# Altium PCB ENCBoard.PcbDoc
Units mm, origin at the board's own origin, x right, y up, seen from the top; angles counter-clockwise.
Board outline 112.2 x 111.6 mm, 2 copper layers (Top Layer, Bottom Layer); 95 components, 68 nets, 396 pads, 127 vias.
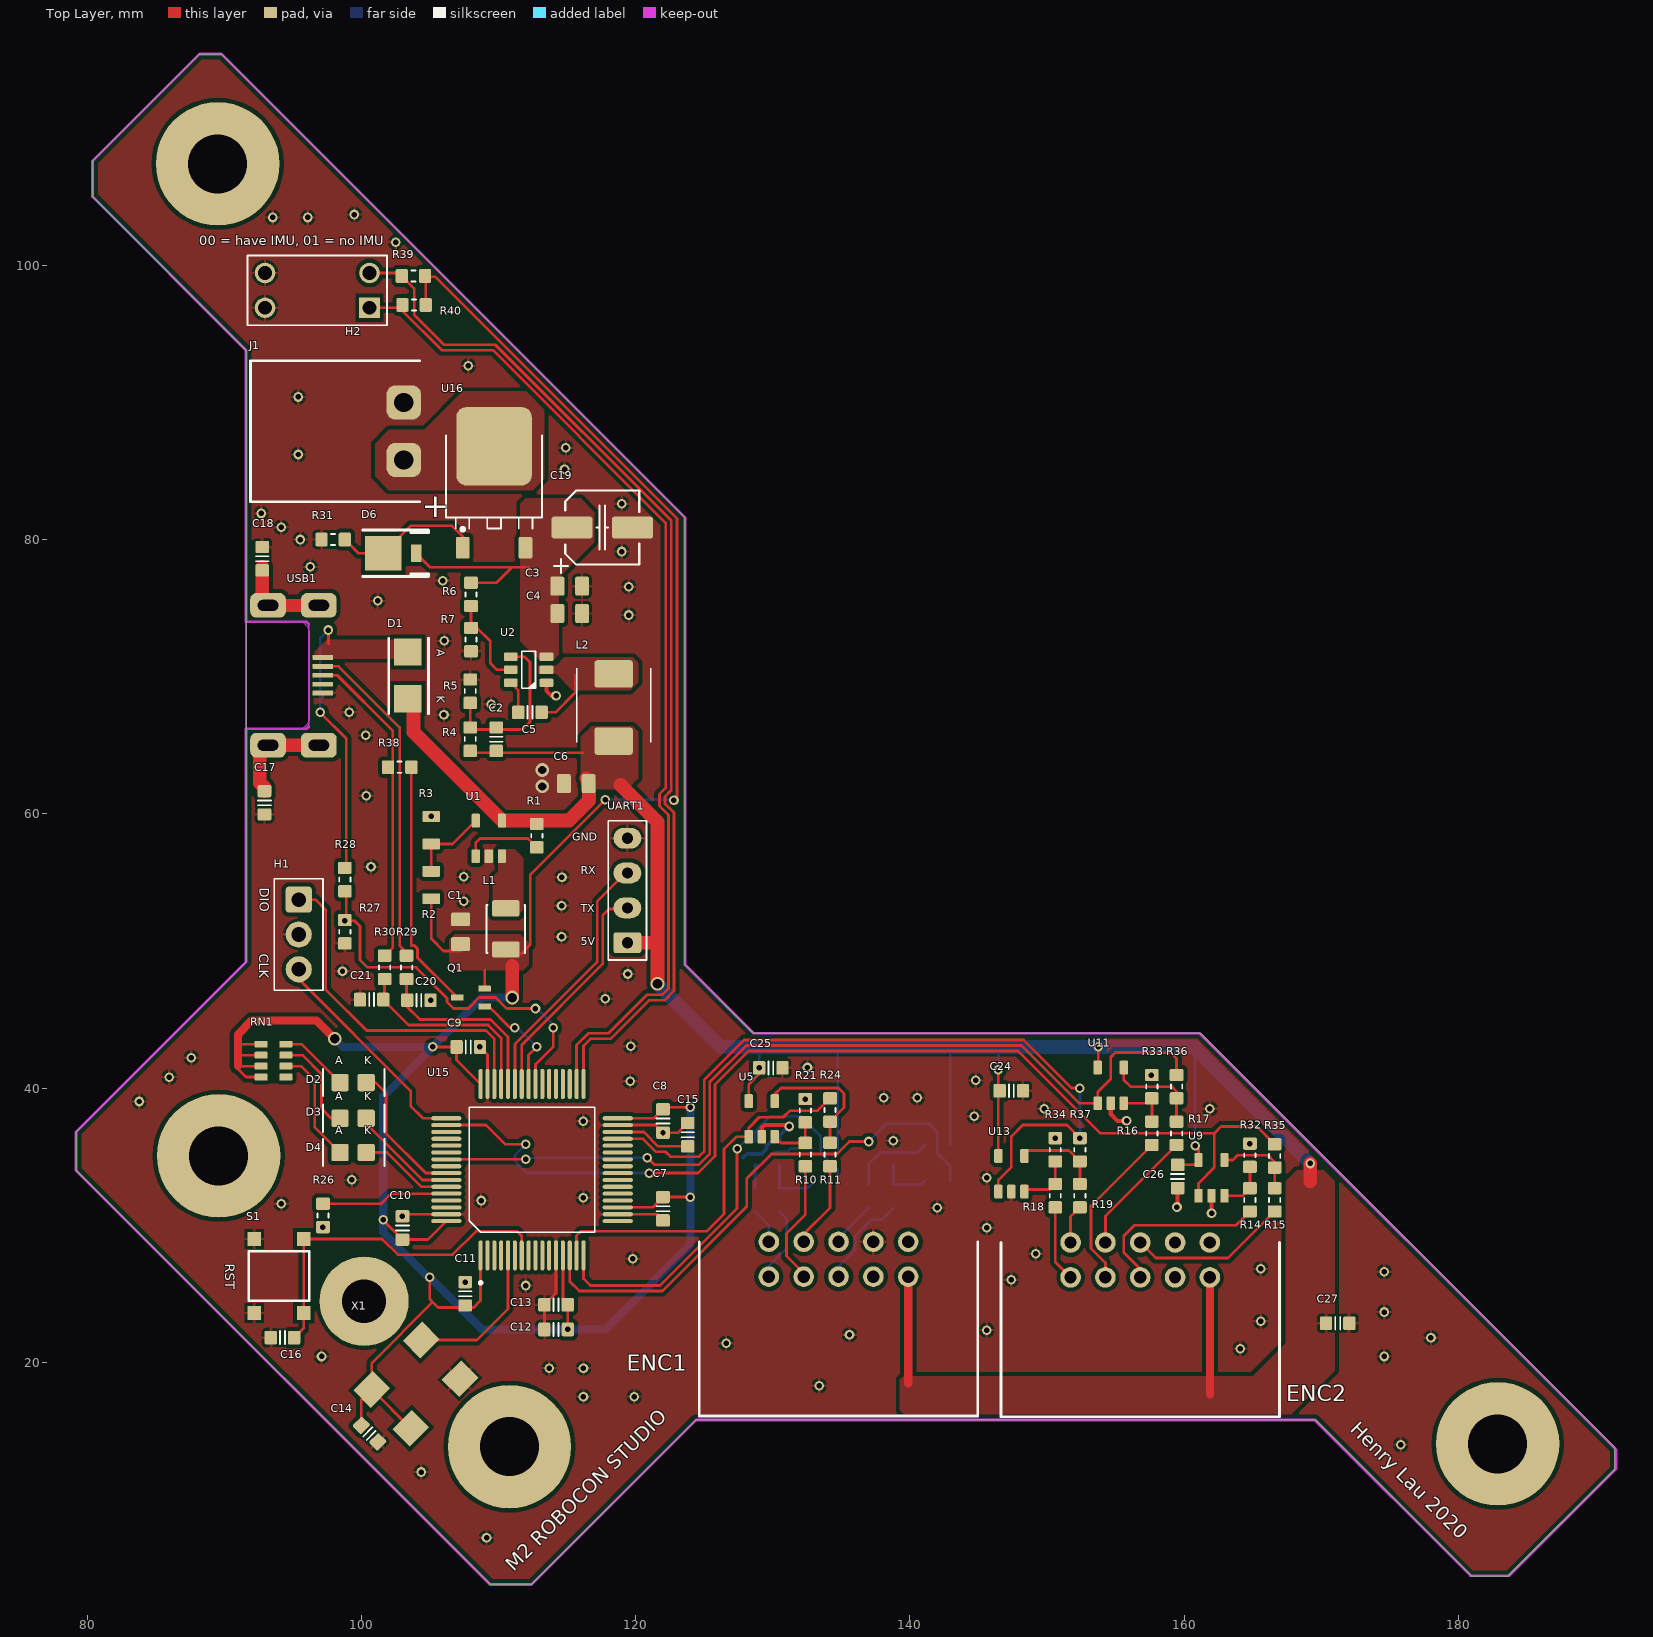
[diagram p0: Top Layer view]
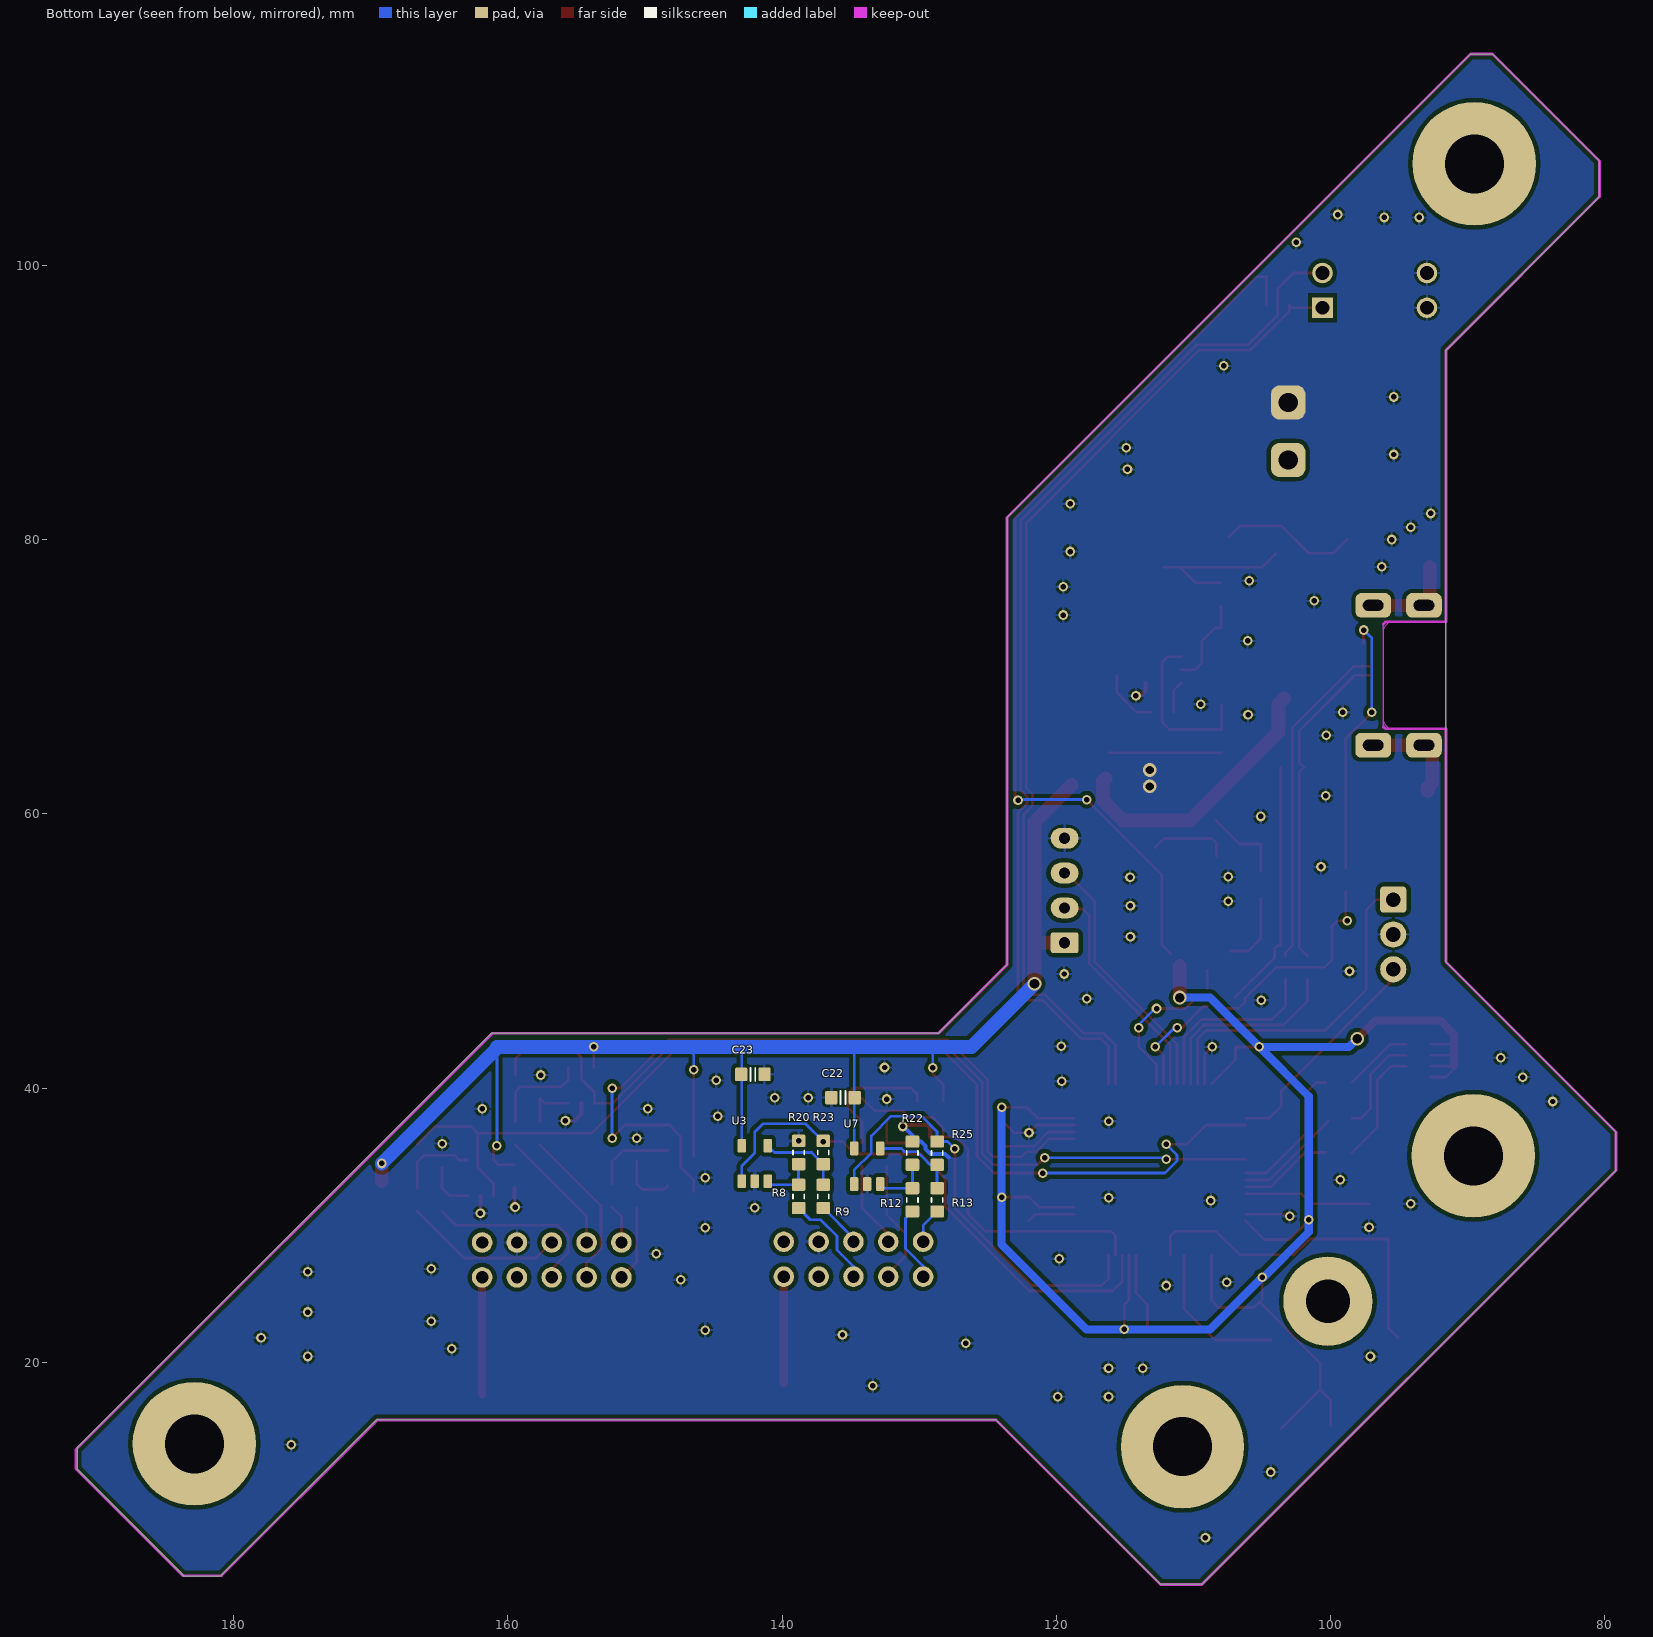
[diagram p1: Bottom Layer view, seen from below]
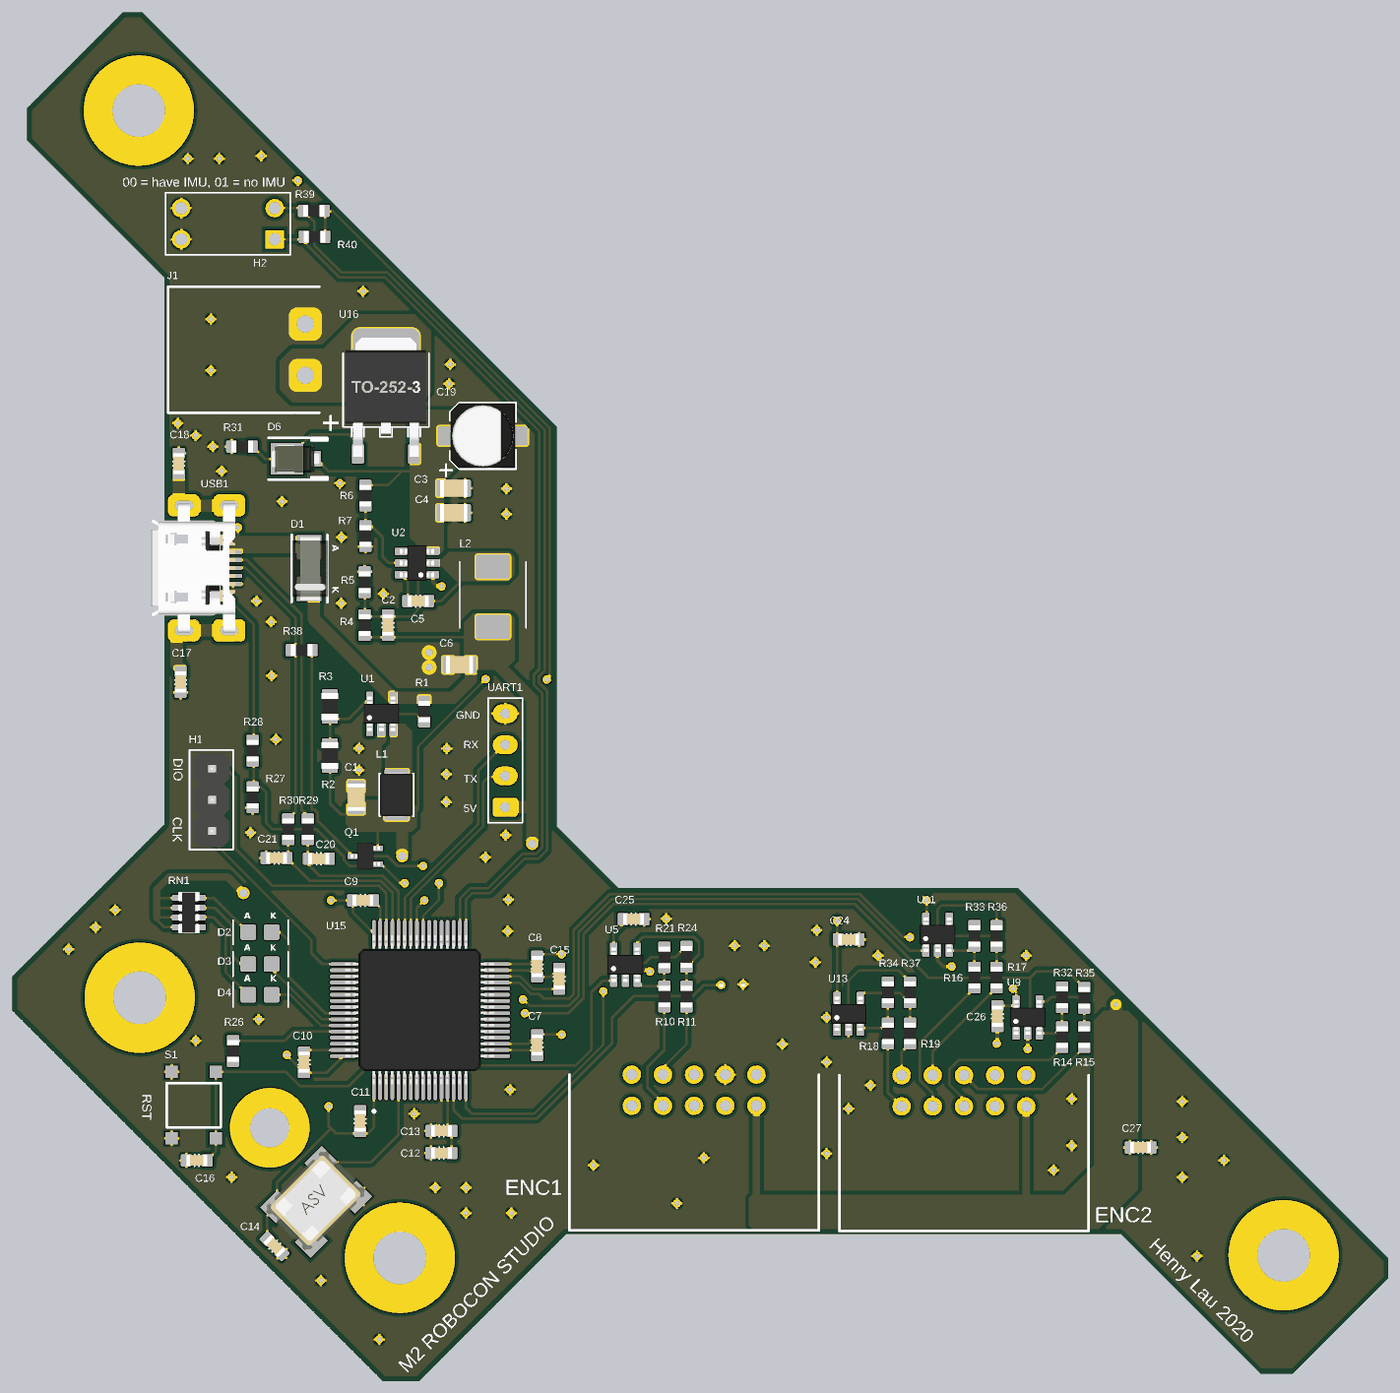
[diagram p2: 3D render of the assembled board from above, using the file's embedded part models]
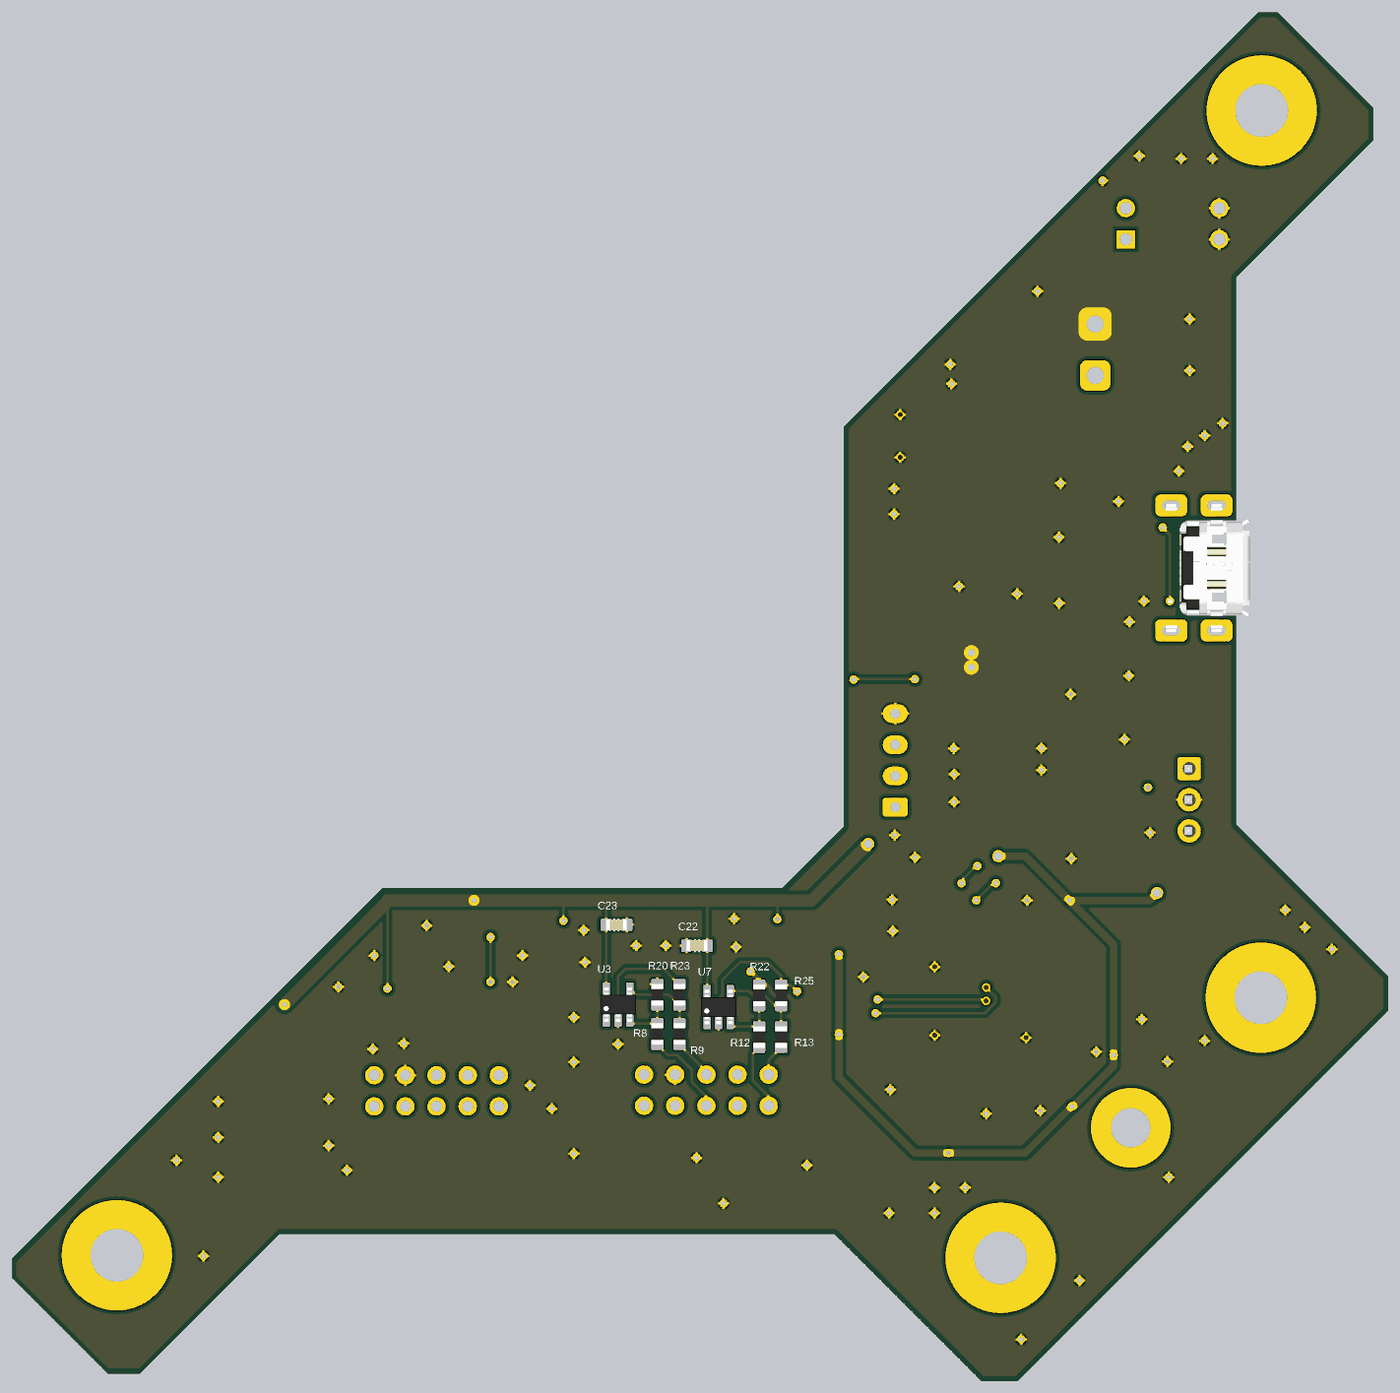
[diagram p3: 3D render of the assembled board from below, using the file's embedded part models]

## Layer stack, top to bottom
Top Solder: solder mask 0.0102, Solder Resist, Dk 3.5
Top Layer: signal copper 0.0356
Dielectric 1: dielectric 0.32, FR-4, Dk 4.8
Bottom Layer: signal copper 0.0356
Bottom Solder: solder mask 0.0102, Solder Resist, Dk 3.5

## Board outline
79.2,34 79.2,36.8 91.6,49.2 91.6,93.8 80.4,105 80.4,107.6 88.2,115.4 89.8,115.4 123.6,81.6 123.6,49 128.6,44 161.2,44 191.4,13.8 191.4,12.2 183.6,4.4 181,4.4 169.6,15.8 124.4,15.8 112.4,3.8 109.4,3.8

## Design rules (kind name [scope] priority, off if disabled: settings)
BoardOutlineClearance [All] p1: gap=0.1 ignorepadtopadclearanceinfootprint=FALSE
Clearance "GND plane" [InNamedPolygon('GND_L02_P028', 'GND_L01_P030')] p1: gap=0.3 ignorepadtopadclearanceinfootprint=FALSE
Clearance 24V [InNet('24V', 'NetJ1_2')] p2: gap=0.3 ignorepadtopadclearanceinfootprint=FALSE
Clearance [All] p3: gap=0.2 ignorepadtopadclearanceinfootprint=FALSE
HoleSize [All] p1: absolutevalues=TRUE maxlimit=100 minlimit=0.4 maxpercent=80.000 minpercent=20.000
MinimumSolderMaskSliver [All] p1: minsoldermaskwidth=0.09
PolygonConnect Power [InNet('24V', 'NetJ1_2', 'NetC5_1', 'NetD1_A') OR InComponent('L1', 'L2', 'C6', 'U1','C1', 'J1', 'C19')or (AsMM(ViaDiameter) > 0.7)] p1: connectstyle=Direct reliefconductorwidth=0.254 reliefentries=4 polygonreliefangle="90 Angle" airgapwidth=0.254
PolygonConnect [All] p2: connectstyle=Relief reliefconductorwidth=0.2 reliefentries=4 polygonreliefangle="90 Angle" airgapwidth=0.2
RoutingVias [All] p1: holewidth=0.4 width=0.7 viastyle="Through Hole" minholewidth=0.4 minwidth=0.7 maxholewidth=99 maxwidth=100
SilkToSilkClearance [All] p1: silktosilkclearance=0.05
SilkToSolderMaskClearance [IsPad] p1: minsilkscreentomaskgap=0.05 clearancetoexposedcopper=TRUE
SolderMaskExpansion [All] p1: expansion=0.102
Width [All] p1: maxlimit=10 minlimit=0.2 preferedwidth=0.2
26 further rules are at their usual default settings.

## Classes and differential pairs
component class U_PWRInput: C19 D6 J1 R31 U16
component class U_STM32F401R: C7 C8 C9 C10 C11 C12 C13 C14 C15 C16 C17 C18 C20 C21 D1 D2 D3 D4 H1 H2 Q1 R26 R27 R28 R29 R30 R38 R39 R40 RN1 S1 U15 UART1 USB1 X1
component class U_EncoderHeader: C22 C23 C24 C25 C26 C27 ENC1 ENC2 R8 R9 R10 R11 R12 R13 R14 R15 R16 R17 R18 R19 R20 R21 R22 R23 R24 R25 R32 R33 R34 R35 R36 R37 U3 U5 U7 U9 U11 U13
component class U_24V_to_5V: C2 C3 C4 C5 C6 L2 R4 R5 R6 R7 U2
component class U_5V_to_3V3: C1 L1 R1 R2 R3 U1

## Components (designator, comment, footprint, x,y, rotation, side; value= is the part's Value field where it differs from the comment)
C1 "Cap" CAPC2012X135N 107.243,51.4 r270 top value=10u
C2 "Cap" CAPC1608X90N 109.843,65.44 r270 top value=100p
C3 "Cap" CAPC2012X135N 115.2,76.6 r180 top value=4u7
C4 "Cap" CAPC2012X135N 115.2,74.6 r180 top value=4u7
C5 "Cap" CAPC1608X90N 112.298,67.4 r180 top value=0.1u
C6 "Cap" CAPC2012X135N 115.674,62.198 r0 top value=22u
C7 "Cap" CAPC1608X90N 122,31.2 r90 top value=1u
C8 "Cap" CAPC1608X90N 122,37.6 r90 top value=1u
C9 "Cap" CAPC1608X90N 107.8,43 r180 top value=1u
C10 "Cap" CAPC1608X90N 103,29.8 r270 top value=1u
C11 "Cap" CAPC1608X90N 107.574,25 r270 top value=1u
C12 "Cap" CAPC1608X90N 114.2,22.4 r0 top value=1u
C13 "Cap" CAPC1608X90N 114.2,24.2 r0 top value=0.1u
C14 "Cap" CAPC1608X90N 100.6,14.8 r135 top value=0.1u
C15 "Cap" CAPC1608X90N 123.8,36.6 r270 top value=4.7u
C16 "Cap" CAPC1608X90N 94.25,21.8 r0 top value=0.1u
C17 "Cap" CAPC1608X90N 92.938,60.8 r270 top value=0.1u
C18 "Cap" CAPC1608X90N 92.78,78.6 r90 top value=0.1u
C19 "Cap Pol1" CAP_ELEC_5x5.7 117.569,80.874 r180 top value=47u
C20 "Cap" CAPC1608X90N 104.2,46.4 r0 top value=0.1u
C21 "Cap" CAPC1608X90N 100.752,46.45 r0 top value=0.1u
C22 "Cap" CAPC1608X90N 135.563,39.304 r180 bottom value=1u
C23 "Cap" CAPC1608X90N 142.132,41 r0 bottom value=1u
C24 "Cap" CAPC1608X90N 147.4,39.806 r180 top value=1u
C25 "Cap" CAPC1608X90N 129.862,41.471 r180 top value=1u
C26 "Cap" CAPC1608X90N 159.527,33.55 r90 top value=1u
C27 "Cap" CAPC1608X90N 171.2,22.852 r180 top value=1u
D1 "MBRA210LT3G" SMA 103.4,71.8 r270 top
D2 "LED_Green_GullWing" LED-0805-A 99.4,40.4 r0 top
D3 "LED_Green_GullWing" LED-0805-A 99.4,37.8 r0 top
D4 "LED_Green_GullWing" LED-0805-A 99.4,35.3 r0 top
D6 "PTV8.2B-M3/84A" DO-220AA 101.6,79 r0 top
ENC1 "Header 5X2H" HDR2x5RA 139.88,28.79 r0 top
ENC2 "Header 5X2H" HDR2x5RA 161.88,28.74 r0 top
H1 "Header" 1x3POS_HEADER 95.436,51.2 r0 top
H2 "DIP 2 position switch" DIP2-SWT 100.6,96.897 r270 top
J1 "Stackable ScrewTerm" 2P_PCB_TERM 103.1,89.991 r0 top value="2 position"
L1 "inductor" INDM3225X240N 110.535,51.605 r270 top value=2u2
L2 "15uH inductor" INDC_5.5x5.3x3 118.4,70.2 r270 top value=15u
Q1 "DTA114YYUA" SOT323 108,46.6 r180 top
R1 "Res1" RESC1608X55N 112.8,58.4 r270 top value=10K
R2 "Res1" RESC2012X70N 105.1,54.805 r270 top value=100K
R3 "Res1" RESC2012X70N 105.1,58.805 r90 top value=22K
R4 "Res1" RESC1608X55N 107.943,65.44 r270 top value=100K
R5 "Res1" RESC1608X55N 107.943,68.94 r90 top value=13K5
R6 "Res1" RESC1608X55N 108,76 r270 top value=10K
R7 "Res1" RESC1608X55N 108,72.7 r90 top value=2K
R8 "Res1" RESC1608X55N 138.8,32.1 r90 bottom value=1K
R9 "Res1" RESC1608X55N 137,32.1 r270 bottom value=1K
R10 "Res1" RESC1608X55N 132.38,35.15 r90 top value=1K
R11 "Res1" RESC1608X55N 134.18,35.15 r270 top value=1K
R12 "Res1" RESC1608X55N 130.5,31.85 r90 bottom value=1K
R13 "Res1" RESC1608X55N 128.7,31.85 r270 bottom value=1K
R14 "Res1" RESC1608X55N 164.8,31.85 r90 top value=1K
R15 "Res1" RESC1608X55N 166.6,31.85 r270 top value=1K
R16 "Res1" RESC1608X55N 157.65,36.7 r90 top value=1K
R17 "Res1" RESC1608X55N 159.45,36.7 r270 top value=1K
R18 "Res1" RESC1608X55N 150.6,32.15 r90 top value=1K
R19 "Res1" RESC1608X55N 152.4,32.15 r270 top value=1K
R20 "Res1" RESC1608X55N 138.8,35.3 r90 bottom value=680R
R21 "Res1" RESC1608X55N 132.38,38.35 r90 top value=680R
R22 "Res1" RESC1608X55N 130.5,35.25 r90 bottom value=680R
R23 "Res1" RESC1608X55N 137,35.3 r270 bottom value=680R
R24 "Res1" RESC1608X55N 134.18,38.4 r270 top value=680R
R25 "Res1" RESC1608X55N 128.7,35.25 r270 bottom value=680R
R26 "Res1" RESC1608X55N 97.206,30.712 r90 top value=10K
R27 "Res1" RESC1608X55N 98.8,51.4 r270 top value=22K
R28 "Res1" RESC1608X55N 98.8,55.2 r270 top value=10K
R29 "Res1" RESC1608X55N 103.3,48.8 r90 top value=22R
R30 "Res1" RESC1608X55N 101.7,48.8 r90 top value=22R
R31 "Res1" RESC1608X55N 97.95,80 r0 top value=4K7
R32 "Res1" RESC1608X55N 164.8,35.1 r90 top value=680R
R33 "Res1" RESC1608X55N 157.65,40.1 r90 top value=680R
R34 "Res1" RESC1608X55N 150.6,35.5 r90 top value=680R
R35 "Res1" RESC1608X55N 166.6,35.05 r270 top value=680R
R36 "Res1" RESC1608X55N 159.45,40.1 r270 top value=680R
R37 "Res1" RESC1608X55N 152.4,35.5 r270 top value=680R
R38 "Res1" RESC1608X55N 102.8,63.4 r180 top value=1K5
R39 "Res1" RESC1608X55N 103.8,99.218 r180 top value=10K
R40 "Res1" RESC1608X55N 103.852,97.103 r180 top value=10K
RN1 "resistor network" RESCAXS50P160X320X70-8N 93.6,42 r0 top value=1K
S1 "SW_THT_PB_4.3mm" TACT_SWT-SMD-4.4 91.8,24.1 r90 top
U1 "TLV62569" SOT23-5 109.3,58.205 r90 top
U2 "TPS54202" SOT23-6 112.2,70.5 r180 top
U3 "TLV9051" SOT23-5 142,34.5 r90 bottom
U5 "TLV9051" SOT23-5 129.2,37.75 r90 top
U7 "TLV9051" SOT23-5 133.8,34.3 r90 bottom
U9 "TLV9051" SOT23-5 162,33.45 r90 top
U11 "TLV9051" SOT23-5 154.65,40.2 r90 top
U13 "TLV9051" SOT23-5 147.4,33.75 r90 top
U15 "STM32F401RxTx" LQFP64 108.7,27.8 r90 top
U16 "DMP4010SK3Q" TO-252 109.681,83.1 r0 top
UART1 "Programmer" HDR1X4_2.54MMP 119.4,50.6 r90 top
USB1 "USB Micro Type B" USB_MICRO-B 91.6,70.1 r270 top
X1 "ASV-8.000MHZ-EJ-T" "ASV SERIES" 103.594,15.194 r45 top

## Footprints (in the part's own frame and the unit in brackets; to place one, negate y for a bottom-side part, rotate by r counter-clockwise, add the part's x,y. Pads: shape width x height; smd on the part's side, far side on the other; paste and mask are expansions set on the pad)
1x3POS_HEADER [mil] "Connector Header, Single-row 3-position, 0.100\" pitch"
  rrect25% 75x75 hole 42: 1(0,100)
  round 75 hole 42: 2(0,0) 3(0,-100)
  silkscreen extent -70,-160 70,160, body extent -57,-150 57,150, height 335
2P_PCB_TERM [mm]
  rrect50% 2.5x2.5 hole 1.4 mask+0.102: 1(0,0) 2(0,-4.191)
  silkscreen extent -11.18,-7.24 1.14,3.05
"ASV SERIES" [mm] "Footprint used for ASV SERIES standard clock oscillator"
  rect 2x1.8 smd mask+0.102: 1(0,0) 2(5.1,0) 3(5.1,4) 4(0,4)
  body extent -0.9,-0.44 6.1,4.64, height 1.8
CAP_ELEC_5x5.7 [mm] "Capacitor, polarized, aluminum can; 5x5.7mm DxH"
  round 0.508 on Mech15: 0(0,0)
  rrect25% 3x1.6 smd: 1(2.2,0) 2(-2.2,0)
  silkscreen extent -2.7,-2.7 3.5,3.3, body extent -2.65,-2.65 2.65,2.65, height 5.7
CAPC1608X90N [mm] "Chip Capacitor, Body 1.6x0.8mm, EIA 0603, IPC Medium Density"
  round 0.254 on Mech15: 0(0,0)
  rrect25% 0.9x1 smd: 1(-0.85,0) 2(0.85,0)
  Top Layer pour cut-out: -0.6,0.5 -0.4,0.7 0.4,0.7 0.6,0.5 0.6,-0.5 0.4,-0.7 -0.4,-0.7 -0.6,-0.5
  silkscreen extent -0.18,-0.48 0.18,0.48, body extent -0.85,-0.45 0.85,0.45, height 0.89
CAPC2012X135N [mm]
  round 0.254 on Mech15: 0(0,0)
  rrect25% 1x1.4 smd: 1(-0.9,0) 2(0.9,0)
  body extent -1.1,-0.72 1.1,0.73, height 1.34
DIP2-SWT [mm]
  rect 1.5x1.5 hole 1: 1(0,0)
  round 1.5 hole 1: 2(-2.54,0) 3(-2.54,-7.62) 4(0,-7.62)
  silkscreen extent -3.81,-8.89 1.27,1.27
DO-220AA [mm]
  rect 2.67x2.54 smd mask+0.102: A(0,0)
  rect 0.762x1.27 smd mask+0.102: K(2.4,0)
  silkscreen extent -1.5,-1.7 3.3,1.7, body extent -1.26,-1.17 2.67,1.14, height 1.15
HDR1X4_2.54MMP [mil] "Connector; Header; 4 Position 0.100\" pitch"
  rrect25% 60x80 hole 32: 1(0,0)
  oval 60x80 hole 32: 2(100,0) 3(200,0) 4(300,0)
  silkscreen extent -50,-55 350,55
HDR2x5RA [mm]
  round 1.5 hole 0.9: 1(0,0) 2(0,-2.54) 3(-2.54,0) 4(-2.54,-2.54) 5(-5.08,0) 6(-5.08,-2.54) 7(-7.62,0) 8(-7.62,-2.54) 9(-10.16,0) 10(-10.16,-2.54)
  silkscreen extent -15.24,-12.7 5.08,0
INDC_5.5x5.3x3 [mm]
  rrect20% 2x2.8 smd: 1(0,0) 2(4.9,0)
  silkscreen extent -0.4,-2.7 5,2.7
INDM3225X240N [mm] "Molded Inductor, 2-Leads, Body 3.2x2.5mm, IPC Medium Density"
  round 0.508 on Mech15: 0(0,0)
  rrect25% 1.2x2 smd: 1(-1.5,0) 2(1.5,0)
  silkscreen extent -1.75,-1.4 1.75,1.4, body extent -1.79,-1.35 1.79,1.35, height 2.4
LED-0805-A [mil]
  round 20 on Mech15: 0(0,0)
  rrect25% 50x50 smd: A(-37.5,0) K(37.5,0)
  Top Layer pour cut-out: -15,30 15,30 15,-30 -15,-30
  silkscreen extent -87,-39 91,39, body extent -39,-25 39,25, height 31
LQFP64 [mm]
  oval 2.2x0.3 smd: 1(0,0) 2(0,-0.5) 3(0,-1) 4(0,-1.5) 5(0,-2) 6(0,-2.5) 7(0,-3) 8(0,-3.5) 9(0,-4) 10(0,-4.5) 11(0,-5) 12(0,-5.5) 13(0,-6) 14(0,-6.5) 15(0,-7) 16(0,-7.5) 33(12.5,-7.5) 34(12.5,-7) 35(12.5,-6.5) 36(12.5,-6) 37(12.5,-5.5) 38(12.5,-5) 39(12.5,-4.5) 40(12.5,-4) 41(12.5,-3.5) 42(12.5,-3) 43(12.5,-2.5) 44(12.5,-2) 45(12.5,-1.5) 46(12.5,-1) 47(12.5,-0.5) 48(12.5,0)
  oval 0.3x2.2 smd: 17(2.5,-10) 18(3,-10) 19(3.5,-10) 20(4,-10) 21(4.5,-10) 22(5,-10) 23(5.5,-10) 24(6,-10) 25(6.5,-10) 26(7,-10) 27(7.5,-10) 28(8,-10) 29(8.5,-10) 30(9,-10) 31(9.5,-10) 32(10,-10) 49(10,2.5) 50(9.5,2.5) 51(9,2.5) 52(8.5,2.5) 53(8,2.5) 54(7.5,2.5) 55(7,2.5) 56(6.5,2.5) 57(6,2.5) 58(5.5,2.5) 59(5,2.5) 60(4.5,2.5) 61(4,2.5) 62(3.5,2.5) 63(3,2.5) 64(2.5,2.5)
  silkscreen extent -2.1,-8.31 10.81,0.81, body extent 0.2,-9.8 12.34,2.34, height 1.6
RESC1608X55N [mm] "Chip Resistor, Body 1.6x0.8mm, EIA 0603, IPC Medium Density"
  round 0.254 on Mech15: 0(0,0)
  rrect25% 0.9x1 smd: 1(-0.85,0) 2(0.85,0)
  Top Layer pour cut-out: -0.6,0.5 -0.4,0.7 0.4,0.7 0.6,0.5 0.6,-0.5 0.4,-0.7 -0.4,-0.7 -0.6,-0.5
  silkscreen extent -0.15,-0.41 0.15,0.41, body extent -0.87,-0.47 0.88,0.48, height 0.54
RESC2012X70N [mm]
  rrect25% 0.8x1.3 smd: 1(-1,0) 2(1,0)
  body extent -1.1,-0.67 1.1,0.68, height 0.69
RESCAXS50P160X320X70-8N [mm] "Resistor Pack, Body 1.6x3.2mm, 4x0603, IPC Medium Density"
  round 0.254 on Mech15: 0(0,0)
  rrect25% 0.95x0.5 smd: 1(-0.9,1.2) 2(-0.9,0.4) 3(-0.9,-0.4) 4(-0.9,-1.2) 5(0.9,-1.2) 6(0.9,-0.4) 7(0.9,0.4) 8(0.9,1.2)
  Top Layer pour cut-out: -0.4,1.7 0.4,1.7 0.4,-1.7 -0.4,-1.7
  body extent -0.87,-1.68 0.88,1.67, height 0.7
SMA [mm]
  rect 2x2 smd mask+0.102: A(0,0) K(3.4,0)
  silkscreen extent -1,-1.4 4.5,1.5, body extent -0.88,-1.36 4.4,1.56, height 2.41
SOT23-5 [mm]
  rrect25% 1x0.6 smd: 1(-1.3,0.95) 2(-1.3,0) 3(-1.3,-0.95) 4(1.3,-0.95) 5(1.3,0.95)
  body extent -1.4,-1.45 1.4,1.45, height 1.44
SOT23-6 [mm]
  round 0.5 on Mech15: 0(0,0)
  rrect25% 1x0.6 smd: 1(-1.3,0.95) 2(-1.3,0) 3(-1.3,-0.95) 4(1.3,-0.95) 5(1.3,0) 6(1.3,0.95)
  silkscreen extent -0.51,-1.35 0.51,1.35, body extent -1.4,-1.45 1.4,1.45, height 1.44
SOT323 [mm] "Small outline 2.1mm L x 1.25mm W x 1.1mm H; 3 lead SC70, EIAJ SC-70, SOT323"
  round 0.5 on Mech15: 0(0,0)
  rrect20% 0.9x0.45 smd: 1(-1,0.65) 2(-1,-0.65) 3(1,0)
  body extent -1.2,-1.1 1.2,1.1, height 1.1
TACT_SWT-SMD-4.4 [mm]
  rect 1x1 smd mask+0.102: 1(-0.5,-4) 1(4.9,-4) 2(-0.5,-0.4) 2(4.9,-0.4)
  silkscreen extent 0.4,-4.4 4,0
TO-252 [mm]
  round 0.5 on Mech15: 0(0,0)
  rrect25% 1x1.6 smd: 1(-2.285,-3.7) 3(2.285,-3.7)
  rrect25% 5.5x5.7 smd: 4(0,3.7)
  silkscreen extent -3.5,-2.47 3.5,4.5, body extent -3.3,-3.95 3.3,5.76, height 2.31
USB_MICRO-B [mm]
  round 0.508 on Mech15: 0(0,0)
  rrect20% 0.35x1.5 smd: 1(-1.3,5.6) 2(-0.65,5.6) 3(0,5.6) 4(0.65,5.6) 5(1.3,5.6)
  rrect50% 1.8x2.6 hole 0.8 slot 1.5 at 90 deg: SH(-5.1,5.3) SH(-5.1,1.6) SH(5.1,1.6)
  rrect40% 1.8x2.6 hole 0.8 slot 1.5 at 90 deg: SH(5.1,5.3)
  Keep-Out Layer board cut-out: -3.9,0 -3.9,3.797 -3.839,4.103 -3.666,4.362 -3.406,4.536 -3.1,4.597 -3.1,4.597 3.1,4.597 3.406,4.536 3.666,4.362 3.839,4.103 3.9,3.797 3.9,3.797 3.9,0
  body extent -5.25,-1.12 5.25,5.8, height 2.15

## Part data
C1 C2 C3 C4 C5 C6 C7 C8 C9 C10 C11 C12 C13 C14 C15 C16 C17 C18 C20 C21 C22 C23 C24 C25 C26 C27: "Capacitor", LatestRevisionDate=17-Jul-2002, LatestRevisionNote="Re-released for DXP Platform.", PackageDescription="Radial Cap, Thru-Hole; 2 Leads; 0.3 in Pin Spacing", PackageReference=RAD-0.3, Published=8-Jun-2000, Publisher="Altium Limited"
C19: "Polarized Capacitor (Radial)", LatestRevisionDate=17-Jul-2002, LatestRevisionNote="Re-released for DXP Platform.", PackageDescription="Polarized Capacitor (Radial); 2 Leads", PackageReference=RB7.6-15, Published=8-Jun-2000, Publisher="Altium Limited"
D1: "Surface Mount  Schottky Power Rectifier", Manufacturer="ON semiconductor", datasheet=http://www.mouser.com/ds/2/308/MBRA210LT3-D-76406.pdf, If=2A, Vf=350mV, Vrrm=10V
D2 D3 D4: "LED Gull-wing SMD High-intensity Green 450mcd 574nm", Color=Green, Manufacturer 1=Ligitek, Manufacturer Part Number 1=L8UG9033/TR1, Package / Case="4.6mm Gull-Wing", Ratings="450 mcd; 574 nm", Material=AlGaInP, SCDType=source
D6: "zener diode, Surface Mount Power Voltage-Regulating Diodes", Manufacturer=Vishay, datasheet=http://www.mouser.com/ds/2/427/ptvxxb-100167.pdf, Pd=1.5W, Vz=8.2V-9.3V
ENC1 ENC2: "Header, 5-Pin, Dual row, Right Angle", LatestRevisionDate=17-Jul-2002, LatestRevisionNote="Re-released for DXP Platform.", Publisher="Altium Limited"
H1: library part Header3P, "Header 3-pin"
H2: library part DIP2
J1: library part 2P_ScrewTerm_90S_3.81MM, "Terminal Block Screw Type THT 2-Position 3.81mm pitch", Color=Black, Manufacturer 1="Tyco Electronics", Manufacturer Part Number 1=1776113-2, Package / Case="Side Entry; 3.81mm pitch", Supplier Part Number 1=A97976-ND, Category="Connectors Interconnects", Pitch="0.150\" (3.81mm)", Positions Per Level=2, SCDType=undef, Supplier 1=Digi-Key
L1: library part INDC, "IHLP SMD 4040", link=http://www.mouser.hk/ProductDetail/Panasonic/ETQ-P5M4R7YFC/?qs=sGAEpiMZZMsg%252by3WlYCkUx1BJssUTVH58rrEHsPkNus%3d
L2: library part INDC_MPX1D0530L150, "15uH inductor with 2A saturation current. Dimension is 5.5 * 5.2 * 3 mm^3", Saturation Current=2A
Q1: "PNP -100mA -50V Digital Transistor (Bias Resistor Built-in Transistor)", Manufacturer=ROHM
R1 R2 R3 R4 R5 R6 R7 R8 R9 R10 R11 R12 R13 R14 R15 R16 R17 R18 R19 R20 R21 R22 R23 R24 R25 R26 R27 R28 R29 R30 R31 R32 R33 R34 R35 R36 R37 R38 R39 R40: "Resistor", LatestRevisionDate=17-Jul-2002, LatestRevisionNote="Re-released for DXP Platform.", PackageDescription="Axial Device, Thru-Hole; 2 Leads; 0.3 in Pin Spacing", PackageReference=AXIAL-0.3, Published=8-Jun-2000, Publisher="Altium Limited"
RN1: library part RES_NET
S1: "Switch, tact, 4.3mm stem", Manufacturer 1=Bond-Tact, Manufacturer Part Number 1=TS-1143-WP-300, Package / Case="6.5x6.5mm; 4.3mm stem", Function=Speed, Material="Brass/Nylon/Ag plating", SCDType=spec
U1: "2-A High Efficiency Synchronous Buck Converter in SOT Package", Manufacturer=TI, Iout(max)=2A, Vin=2.5-5.5V
U2: "4.5-28V input 2A output step down, EMI Friendly Synchronous Step Down Converter", Currrent=2A, Vin(max)=28V, Vin(min)=4.5V
U3 U5 U7 U9 U11 U13: library part TLV9051SIDBVR, "TLV9051 single channel opamp from TI"
UART1: library part Header4P, "Header 4-pin"
USB1: library part USB_Micro_TypeB, "Connector SMD USB Micro Type B middle mount", Manufacturer 1="Molex Inc", Manufacturer Part Number 1=47491-0001, Package / Case=SMD, Supplier Part Number 1=WM17142CT-ND, SCDType=undef, Supplier 1=Digi-Key
X1: "3.3Vdc HCMOS SMD Crystal Clock Oscillator", Frequency=8.000MHz, Manufacturer=Abracon, VDD=3.3V

## Free pads (board coordinates)
  round 9 hole 4.3: 6(89.594,35.061) 7(89.524,107.398) 7(110.808,13.847) 7(182.862,14.06)
  round 6.5 hole 3.2: 8(100.201,24.454)

## Via types
v1: diameter 0.7, hole 0.4, Top Layer to Bottom Layer, 122 vias
v2: diameter 1, hole 0.7, Top Layer to Bottom Layer, 3 vias
v3: diameter 1, hole 0.6, Top Layer to Bottom Layer, 2 vias

## Nets (pads, with @x,y where several pads share a name; then routed paths per layer and width w, separated by ;. In a path a pad name is that pad's centre, name@x,y a point inside that pad or via, vN(x,y) a via of type N, cw(c..) or ccw(c..) an arc to the next point about the centre after c; other vN are vias at no path point)
3V3: C1.2 C7.2 C8.2 C9.2 C10.2 C11.2 C12.2 C13.2 C14.2 L1.2 Q1.2 R2.2 R39.1 R40.1 RN1.1 RN1.2 RN1.3 RN1.4 U15.1 U15.13 U15.19 U15.32 U15.48 U15.64 X1.1 X1.4 | length 213.4
  Top Layer w0.2: 91,42.4 RN1.2 ; 91,43.2 RN1.1 ; RN1.4 91.597,40.8 91,41.397 91,41.6 RN1.3 ; C14.2 99.999,17.256 X1.4 ; v1(101.6,30.4) 101.6,30.35 C10.2 104.85,28.95 U15.64 ; X1.1 X1.4 ; R39.1 R39.1@104.702,99.165 ; R40.1 R39.1@104.702,99.165 ; v1(105,26.2) 105,24.6 105.2,24.4 ; R2.2 105.1,50.9 106,50 107.3,50 ; v1(105.2,43) C9.2 106.95,42.05 U15.48 ; U15.1 108.7,24.5 108.2,24 105.6,24 105.2,24.4 ; Q1.2 109,48.576 ; 111.672,49.801 112.313,50.442 112.313,55.55 115.468,58.705 115.47,58.705 117.4,60.635 117.4,60.637 v1(117.801,61.038) ; U15.13 114.7,24.55 C13.2 v1(115.05,22.4) ; U15.19 121.25,31.3 C7.2 v1(124,32.05) ; U15.32 121.35,37.8 C8.2 ; C8.2@122,38.4 122.2,38.6 v1(124,38.6) ; v1(122.8,61) 123.017,61.217 123.017,81.521 105.373,99.165 R39.1@104.702,99.165 ; X1.4 100.765,19.965 105.2,24.4
  Top Layer w0.6: 91,41.6 91,42.4 91,43.2 91,43.91 92.008,44.918 96.74,44.918 v2(98.059,43.6)
  Top Layer w1: v2(111,46.6) 111,48.9
  Bottom Layer w0.2: v1(117.801,61.038) 122.762,61.038 v1(122.8,61)
  Bottom Layer w0.6: v2(98.059,43.6) 98.659,43 v1(105.2,43) ; v1@104.95,26.15 101.6,29.5 101.6,39.4 v1(105.2,43) ; v1(105,26.2) 108.8,22.4 v1(115.05,22.4) 117.8,22.4 124,28.6 v1(124,38.6) ; v2(111,46.6) 108.8,46.6 v1(105.2,43)
5V: C2.2 C6.2 C22.2 C23.2 C24.2 C25.2 C26.2 C27.2 D1.K ENC1.2 ENC2.2 L2.2 R1.1 R4.2 U1.4 U3.5 U5.5 U7.5 U9.5 U11.5 U13.5 UART1.1 | length 155.3
  Top Layer w0.2: R4.2@107.95,64.45 116.15,64.45 ; U5.5 128.25,40.25 129.012,41.012 v1(129.012,41.471) ; U13.5 v1(146.45,41.332) ; U11.5 153.744,41.544 v1(153.744,43) ; C26.2 160.7,34.4 U9.5 161.05,35.55 v1(160.8,35.8)
  Top Layer w0.6: 139.88,18.48 ENC1.2 ; 161.88,17.68 ENC2.2
  Top Layer w1: D1.K 103.802,67.998 103.802,65.953 U1.4 115.139,59.505 116.6,60.966 116.6,62.4 C6.2@116.4,62.6 ; 118.9,62.1 121.6,59.4 121.6,50.6 ; UART1.1 121.6,50.6 ; v2(121.6,47.6) 121.6,50.6 ; 169.2,33.2 v1(169.2,34.5)
  Bottom Layer w0.2: 129,42.6 128.983,42.583 129.012,42.554 v1(129.012,41.471) ; U7.5 134.75,42.55 135.2,43 ; U3.5 142.95,42.55 143.4,43 ; v1(146.45,41.332) 146.45,42.45 147,43 ; v1(160.8,35.8) 160.8,42.6 ; 160.8,42.9 160.8,43
  Bottom Layer w1: v2(121.6,47.6) 126.2,43 135.2,43 143.4,43 147,43 v1(153.744,43) 160.8,43 ; 160.8,42.9 v1(169.2,34.5)
24V: C3.2 C4.2 C19.1 D6.K R6.1 U2.3 U16.3 | length 12.1
  Top Layer w0.2: D6.K 105.027,77.973 110.973,77.973 ; R6.1 109.85,76.85 110.973,77.973 ; 112.2,77.973 110.973,77.973
ENC1_CHA: R23.1 U3.1 U15.14 | length 39.5
  Top Layer w0.2: U15.14 115.2,25.9 115.9,25.2 121.951,25.2 128.11,31.359 128.11,33.41 129.9,35.2 134.688,35.2 135.588,36.1 v1(137,36.1)
  Bottom Layer w0.2: v1(137,36.1) 138.3,37.4 141.4,37.4 142,36.8 142,35.25 142.95,34.3 U3.1
ENC1_CHA+: ENC1.6 R8.1 | length 7.1
  Bottom Layer w0.2: ENC1.6 134.8,27 136,28.2 136,29.2 137.2,30.4 137.95,30.4 R8.1
ENC1_CHA-: ENC1.5 R9.2 | length 3.4
  Bottom Layer w0.2: ENC1.5 134.8,29.05 R9.2
ENC1_CHB: R24.1 U5.1 U15.15 | length 27.2
  Top Layer w0.2: U15.15 115.7,29.25 116,29.55 125.169,29.55 126.444,30.825 126.444,35.542 127.353,36.45 U5.1 128.25,37.1 129.02,37.87 130.77,37.87 131.25,38.35 133.28,38.35 R24.1
ENC1_CHB+: ENC1.8 R10.1 | length 9.2
  Top Layer w0.2: ENC1.8 132.38,26.37 131,27.75 131,29.4 132.38,30.78 R10.1
ENC1_CHB-: ENC1.7 R11.2 | length 6.3
  Top Layer w0.2: ENC1.7 132.26,29.341 134.18,31.261 R11.2
ENC1_CHI: R25.1 U7.1 U15.16 | length 31.9
  Top Layer w0.2: U15.16 116.2,26.1 116.7,25.6 121.785,25.6 127.4,31.215 v1(127.4,35.571)
  Bottom Layer w0.2: v1(127.4,35.571) 127.414,35.571 127.943,36.1 R25.1 128.7,36.814 129.836,37.95 132.059,37.95 133.494,36.515 133.494,35.266 134.75,34.01 U7.1
ENC1_CHI+: ENC1.10 R12.1 | length 5.5
  Bottom Layer w0.2: ENC1.10 129.72,27.02 131,28.3 131,30.5 R12.1
ENC1_CHI-: ENC1.9 R13.2 | length 2.6
  Bottom Layer w0.2: R13.2 129.72,29.98 ENC1.9
ENC2_CHA: R35.1 U9.1 U15.50 | length 78.7
  Top Layer w0.2: U15.50 109.1,37.3 110.503,35.897 v1(111.985,35.897) ; v1(121,33.8) 124.566,33.8 125.8,35.034 125.8,40.256 128.244,42.7 147.9,42.7 153.9,36.7 162.2,36.7 ; U9.1 161.05,33.05 162.2,34.2 162.2,36.7 ; R35.1 165.3,37.2 162.7,37.2 162.2,36.7
  Bottom Layer w0.2: v1(111.985,35.897) 111.2,35.112 111.2,34.681 112.081,33.8 v1(121,33.8)
ENC2_CHA+: ENC2.6 R14.1 | length 13.4
  Top Layer w0.2: ENC2.6 156.8,26.8 155.6,28 155.6,29.2 156.4,30 163.8,30 R14.1
ENC2_CHA-: ENC2.5 R15.2 | length 11.7
  Top Layer w0.2: ENC2.5 157.94,27.6 163.2,27.6 R15.2
ENC2_CHB: R36.1 U11.1 U15.55 | length 66.2
  Top Layer w0.2: U15.55 v1(112,34.8) ; v1(120.841,34.918) 120.882,34.918 121.4,34.4 124.6,34.4 125.4,35.2 125.4,40.421 128.079,43.1 148.134,43.1 152.334,38.9 U11.1 153.7,39.7 154.65,40.65 154.65,42.25 155,42.6 159,42.6 159.45,42.15 R36.1
  Bottom Layer w0.2: v1(112,34.8) 112.118,34.918 v1(120.841,34.918)
ENC2_CHB+: ENC2.8 R16.1 | length 11.9
  Top Layer w0.2: ENC2.8 154.26,27.255 153.21,28.305 153.21,31.41 R16.1
ENC2_CHB-: ENC2.7 R17.2 | length 9.3
  Top Layer w0.2: ENC2.7 154.26,30.66 R17.2
ENC2_CHI: R37.1 U13.1 U15.29 | length 56.1
  Top Layer w0.2: U15.29 120.534,36.3 121.484,35.35 122.2,35.35 122.55,35 124.634,35 125,35.366 125,40.587 127.913,43.5 148.3,43.5 151.8,40 v1(152.4,40) ; U13.1 146.45,33.3 147.4,34.25 147.4,36.466 148.234,37.3 151.45,37.3 v1(152.4,36.35)
  Bottom Layer w0.2: v1(152.4,36.35) v1(152.4,40)
ENC2_CHI+: ENC2.10 R18.1 | length 5.6
  Top Layer w0.2: R18.1 150.6,27.32 ENC2.10
ENC2_CHI-: ENC2.9 R19.2 | length 2.8
  Top Layer w0.2: ENC2.9 151.72,30.62 R19.2
GND: C1.1 C3.1 C4.1 C6.1 C7.1 C8.1 C9.1 C10.1 C11.1 C12.1 C13.1 C14.1 C15.1 C16.1 C17.2 C18.2 C19.2 C20.2 C21.1 C22.1 C23.1 C24.1 C25.1 C26.1 C27.1 ENC1.3 ENC2.3 H1.2 H2.3 H2.4 J1.1 R3.2 R5.2 R7.1 R20.2 R21.2 R22.2 R26.1 R27.2 R31.1 R32.2 R33.2 R34.2 S1.2 U1.2 U2.1 U3.2 U5.2 U7.2 U9.2 U11.2 U13.2 U15.12 U15.18 U15.31 U15.47 U15.63 UART1.4 USB1.5 X1.2 | length 34.8
  Top Layer w0.2: v1(103,30.65) 103.15,30.8 U15.63 ; v1(108.65,43) 109.2,42.45 U15.47 ; C12.1 C13.1 114.2,25.05 U15.12 ; U15.18 121.55,30.8 C7.1 ; U15.31 121.45,37.3 v1(122,36.75) 123.1,36.75 C15.1
  Top Layer w0.3: U2.1 113.5,68.958 113.858,68.6 v1(114.2,68.6) ; U5.2 129.2,37.112 129.388,37.3 131.1,37.3 v1(131.2,37.2) ; U11.2 154.65,38.1 155.144,37.606 v1(155.8,37.606) ; v1(159.478,31.326) 159.527,31.376 C26.1 ; v1(162,30.876) U9.2
  Bottom Layer w0.3: 127.85,34.925 127.85,34.929 128.121,35.2 129.179,35.2 129.55,35.571 129.55,35.783 129.867,36.1 R22.2 130.5,36.55 131.15,37.2 v1(131.2,37.2)
  other v1: 109.133,7.2 104.372,12 175.8,14 116.2,17.5 119.9,17.5 133.4,18.292 113.7,19.578 116.2,19.578 97.1,20.426 174.6,20.426 164.1,21 126.6,21.4 178,21.8 135.6,22.013 145.6,22.352 165.588,23 174.6,23.67 111.985,25.6 107.574,25.85 147.4,26.02 174.6,26.6 165.588,26.815 119.8,27.562 149.177,27.915 145.6,29.813 97.206,29.862 142,31.273 94.173,31.562 108.736,31.8 116.183,32 99.3,33.3 145.6,33.454 164.8,35.95 138.8,36.15 150.6,36.35 116.183,37.584 144.687,37.95 149.792,38.5 161.882,38.5 83.8,39.02 132.38,39.2 138.106,39.304 140.53,39.304 119.6,40.494 144.8,40.559 86,40.8 157.602,40.95 132.534,41.5 87.6,42.212 119.654,43.047 105.05,46.4 117.785,46.513 119.439,48.317 98.629,48.513 114.6,51.027 114.6,53.289 107.474,53.624 114.633,55.381 107.474,55.4 100.707,56.127 105.1,59.805 100.352,61.312 100.31,65.717 106.027,67.224 99.123,67.4 109.463,67.996 106.058,72.606 119.5,74.494 101.201,75.524 119.5,76.562 105.927,77 96.275,78 119,79.124 95.559,80 94.17,80.9 92.7,81.9 119,82.6 114.818,85.115 95.397,86.2 114.918,86.7 95.397,90.395 107.8,92.659 102.5,101.685 93.534,103.485 96.093,103.485 99.5,103.7
  other v3: 113.2,62 113.2,63.2
LED1: D2.K U15.57 | length 10.3
  Top Layer w0.2: D2.K 101.038,40.4 101.8,39.638 101.8,36.7 104.7,33.8 U15.57
LED2: D3.K U15.58 | length 7.8
  Top Layer w0.2: D3.K@100.152,37.6 104.452,33.3 U15.58
LED3: D4.K U15.59 | length 6.9
  Top Layer w0.2: D4.K 101.887,35.3 104.387,32.8 U15.59
NetC2_1: C2.1 R4.1 R5.1 U2.4 | length 12.3
  Top Layer w0.2: R5.1@107.95,67.95 107.95,66.15 109.85,66.15 111.756,66.15 112.298,66.691 112.298,71.05 111.898,71.45 U2.4
NetC5_1: C5.1 L2.1 U2.2 | length 4.3
  Top Layer w0.2: C5.1 114.15,67.4 115.6,68.85 115.6,70.1
NetC5_2: C5.2 U2.6 | length 2.4
  Top Layer w0.2: U2.6 111.448,69.002 C5.2
NetC15_2: C15.2 U15.30 | length 5.5
  Top Layer w0.2: U15.30 120.6,36.8 121.65,35.75 C15.2
NetC16_2: C16.2 S1.1 U15.7 | length 26.1
  Top Layer w0.2: C16.2 95.8,22.5 95.8,23.6 95.8,29 101.518,29 102.668,27.85 106.65,27.85 108.35,29.55 111.35,29.55 111.7,29.2 U15.7
NetC17_1: C17.1 C18.1 USB1.SH | length 14.5
  Top Layer w1: USB1.SH@92.78,75.162 93.2,75.166 USB1.SH@96.9,75.2 ; C18.1@92.78,78 C18.1 92.78,75.62 USB1.SH@93.2,75.2 ; C17.1 92.938,61.912 92.6,62.25 92.6,64.4 93.2,65 USB1.SH@96.9,65
NetD1_A: D1.A R28.1 USB1.1 | length 19.4
  Top Layer w0.2: v1(97.002,67.4) 98.9,65.502 R28.1@98.9,56.05 ; 97.6,72.398 v1(97.6,73.4)
  Bottom Layer w0.2: v1(97.002,67.4) 97.002,72.802 v1(97.6,73.4)
NetD2_A: D2.A RN1.8 | length 5.1
  Top Layer w0.2: RN1.8 95.647,43.2 D2.A
NetD3_A: D3.A RN1.7 | length 7.3
  Top Layer w0.2: RN1.7 95.707,42.4 97.1,41.007 97.1,38.5 97.8,37.8 D3.A
NetD4_A: D4.A RN1.6 | length 8.6
  Top Layer w0.2: RN1.6 95.607,41.6 96.6,40.607 96.6,37.148 D4.A
NetD6_A: D6.A R31.2 U16.1 | length 10.2
  Top Layer w0.2: R31.2 99.8,79 D6.A 103.6,81 106.615,81 107.415,80.2
NetJ1_2: J1.2 U16.4
NetL1_1: L1.1 U1.3
NetQ1_3: Q1.3 R38.1 | length 18.3
  Top Layer w0.2: R38.1 103.65,50.4 103.858,50.4 104.1,50.158 104.1,49.5 Q1.3
NetR1_2: R1.2 U1.1 | length 5.8
  Top Layer w0.2: U1.1 108.35,57.9 108.65,58.2 112.15,58.2 R1.2
NetR2_1: R2.1 R3.1 U1.5 | length 6
  Top Layer w0.2: R2.1 R3.1 106.65,57.805 U1.5
NetR6_2: R6.2 R7.2 U2.5 | length 6.7
  Top Layer w0.2: R6.2 R7.2 108.45,73.55 109.4,72.6 109.4,71 109.9,70.5 U2.5
NetR8_2: R8.2 R20.1 U3.3 | length 3.9
  Bottom Layer w0.2: R20.1 R8.2 140.8,32.95 U3.3
NetR9_1: R9.1 R23.2 U3.4 | length 6.1
  Bottom Layer w0.2: R9.1 R23.2 137.85,35.3 140.55,35.3 U3.4
NetR10_2: R10.2 R21.1 U5.3 | length 3.9
  Top Layer w0.2: U5.3 130.6,36 R10.2 R21.1
NetR11_1: R11.1 R24.2 U5.4 | length 9.9
  Top Layer w0.2: U5.4 130.15,39.55 130.6,40 134.8,40 135.2,39.6 135.2,38.57 R24.2 R11.1
NetR12_2: R12.2 R22.1 U7.3 | length 4.2
  Bottom Layer w0.2: R22.1 R12.2 132.55,32.7 U7.3
NetR13_1: R13.1 R25.2 U7.4 | length 6.4
  Bottom Layer w0.2: R13.1 R25.2 129.201,34.4 129.7,34.899 129.7,34.908 130.142,35.35 131.058,35.35 131.308,35.6 U7.4
NetR14_2: R14.2 R32.1 U9.3 | length 3.6
  Top Layer w0.2: U9.3 164.25,32.15 R14.2 R32.1
NetR15_1: R15.1 R35.2 U9.4 | length 5.9
  Top Layer w0.2: U9.4 163.55,34.75 163.9,35.1 166.1,35.1 166.6,34.6 R35.2 R15.1
NetR16_2: R16.2 R33.1 U11.3 | length 3.9
  Top Layer w0.2: U11.3 157.3,38.9 R33.1 R16.2
NetR17_1: R17.1 R36.2 U11.4 | length 7.3
  Top Layer w0.2: U11.4 155.6,40.6 156.1,40.1 159.1,40.1 159.45,39.75 R36.2 R17.1
NetR18_2: R18.2 R34.1 U13.3 | length 4.2
  Top Layer w0.2: U13.3@148.35,32.85 148.6,32.6 150.2,32.6 R18.2 R34.1
NetR19_1: R19.1 R37.2 U13.4 | length 6
  Top Layer w0.2: U13.4@148.35,35.45 151.6,35.45 R37.2 R19.1
NetR26_2: R26.2 U15.60 | length 9.3
  Top Layer w0.2: R26.2 101.422,31.562 102.161,32.3 U15.60
NetR29_2: R29.2 USB1.2 | length 24.3
  Top Layer w0.2: USB1.2 98.35,70.75 102.8,66.3 102.8,50.4 103.3,49.9 R29.2
NetR30_2: R30.2 R38.2 USB1.3 | length 23.7
  Top Layer w0.2: USB1.3 98.246,70.1 102.3,66.046 102.3,63.75 R38.2 102.3,63.05 102.3,50.25 R30.2
NetU15_5: U15.5 X1.3 | length 11.2
  Top Layer w0.2: X1.3 108.428,21.628 110.7,23.9 U15.5
STAT1: H2.2 R39.2 U15.33 | length 76.4
  Top Layer w0.2: H2.2 102.731,99.437 R39.2 103.852,98.315 103.852,96.387 106.035,94.205 109.768,94.205 122.6,81.373 122.6,61.719 122.15,61.269 122.15,60.731 122.8,60.08 122.8,47.103 122.097,46.4 120.982,46.4 118.174,43.592 116.713,43.592 116.2,43.08 116.2,41.709 U15.33
STAT2: H2.1 R40.2 U15.34 | length 74.2
  Top Layer w0.2: H2.1 102.797,96.897 R40.2 103.002,96.672 105.869,93.805 109.602,93.805 122.192,81.215 122.192,61.877 121.75,61.435 121.75,60.565 122.4,59.915 122.4,48.384 122.4,47.269 121.931,46.8 120.816,46.8 118.016,44 116.555,44 115.7,43.145 U15.34
SWCLK: H1.3 U15.49 | length 16.3
  Top Layer w0.2: H1.3 95.436,47.948 103.6,39.784 103.6,38.7 104.5,37.8 U15.49
SWDIO: H1.1 U15.46 | length 25.2
  Top Layer w0.2: H1.1 96.66,53.74 97.4,53 97.4,47.2 100.4,44.2 109.084,44.2 109.7,43.584 U15.46
UART1_RX: U15.43 UART1.3 | length 19.4
  Top Layer w0.2: U15.43 111.2,43.2 117.2,49.2 117.2,53.6 119.2,55.6 UART1.3@120,55.6
UART1_TX: U15.42 UART1.2 | length 17.3
  Top Layer w0.2: U15.42 111.7,43.134 117.6,49.034 117.6,52.597 118.063,53.06 UART1.2@120,53.06
USB_DISC: Q1.1 U15.41 | length 8
  Top Layer w0.2: Q1.1 109.3,45.95 110.85,44.4 v1(111.2,44.4) ; U15.41 112.2,42.4 v1(112.8,43)
  Bottom Layer w0.2: v1(111.2,44.4) 111.4,44.4 v1(112.8,43)
USB_DN: C20.1 R29.1 U15.44 | length 13.7
  Top Layer w0.2: R29.1 103.3,45.966 104.266,45 109.416,45 110.7,43.716 U15.44
USB_DP: C21.2 R30.1 U15.45 | length 14.6
  Top Layer w0.2: R30.1 101.7,46.35 103.45,44.6 109.25,44.6 110.2,43.65 U15.45
USB_P: R27.1 R28.2 U15.40 | length 27.6
  Top Layer w0.2: v1(98.8,52.2) 99.502,52.2 99.902,51.8 99.902,49.341 100.442,48.801 103.999,48.801 106.25,46.55 106.25,46.277 106.727,45.8 107.8,45.8 108.25,46.25 108.25,46.273 108.577,46.6 109.8,46.6 110.6,45.8 v1@112.7,45.8 ; R27.1@98.9,52.25 R28.2@98.9,54.35 ; U15.40 112.7,41.731 114,43.031 v1(114,44.4)
  Bottom Layer w0.2: v1(112.7,45.8) 112.8,45.8 114,44.6 v1(114,44.4)
pads on no net: C1.0 C2.0 C3.0 C4.0 C5.0 C6.0 C7.0 C8.0 C9.0 C10.0 C11.0 C12.0 C13.0 C14.0 C15.0 C16.0 C17.0 C18.0 C19.0 C20.0 C21.0 C22.0 C23.0 C24.0 C25.0 C26.0 C27.0 D2.0 D3.0 D4.0 ENC1.1 ENC1.4 ENC2.1 ENC2.4 L1.0 Q1.0 R1.0 R4.0 R5.0 R6.0 R7.0 R8.0 R9.0 R10.0 R11.0 R12.0 R13.0 R14.0 R15.0 R16.0 R17.0 R18.0 R19.0 R20.0 R21.0 R22.0 R23.0 R24.0 R25.0 R26.0 R27.0 R28.0 R29.0 R30.0 R31.0 R32.0 R33.0 R34.0 R35.0 R36.0 R37.0 R38.0 R39.0 R40.0 RN1.0 RN1.5 U2.0 U15.2 U15.3 U15.4 U15.6 U15.8 U15.9 U15.10 U15.11 U15.17 U15.20 U15.21 U15.22 U15.23 U15.24 U15.25 U15.26 U15.27 U15.28 U15.35 U15.36 U15.37 U15.38 U15.39 U15.51 U15.52 U15.53 U15.54 U15.56 U15.61 U15.62 U16.0 USB1.0 USB1.4

## Polygon pours and split planes (outlines as drawn)
GND on Top Layer "GND_L01_P030" (solid, pour order 30): 87.836,115.391 89.436,115.391 123.236,81.591 123.236,48.991 128.236,43.991 160.836,43.991 191.036,13.791 191.036,12.191 183.236,4.391 180.636,4.391 169.236,15.791 124.036,15.791 112.036,3.791 109.036,3.791 78.836,33.991 78.836,36.791 91.236,49.191 91.236,93.791 80.036,104.991 80.036,107.591
5V on Top Layer "NETJ1_2_L01_P-001" (solid, pour order 22): 139.6,16.2 167.8,16.2 171,19.4 171,33.2 170.2,34 168.2,34 167.4,33.2 167.4,21.4 165,19 139.55,19 139.268,18.718 139.268,16.532
GND on Top Layer "NETJ1_2_L01_P-001" (solid, pour order 20): 112.6,63.8 114.8,63.8 115.2,63.4 115.2,61.8 114.8,61.4 112.55,61.4 112.2,61.75 112.2,63.4
3V3 on Top Layer "NETJ1_2_L01_P-001" (solid, pour order 18): 106.2,48.801
3V3 on Top Layer "NETJ1_2_L01_P-001" (solid, pour order 16): 106.4,50.8 106.8,51.2 111.6,51.2 112.2,50.6 112.2,49.002 111.798,48.6 107,48.6 106.4,49.2
NetL1_1 on Top Layer "NETJ1_2_L01_P-001" (solid, pour order 14): 110,57.4 111.2,57.4 111.8,56.8 111.8,53 111.4,52.6 109.8,52.6 109.6,52.8 109.6,55.405 110,55.805
no net on Top Layer "NETJ1_2_L01_P-001" (solid, pour order 12): 111.6,55.8
NetD1_A on Top Layer "NETJ1_2_L01_P-001" (solid, pour order 10): 96.602,71.802 97.498,72.698 103.802,72.698 103.802,71.302 96.602,71.302
5V on Top Layer "5V_L01_P008" (solid, pour order 8): 116.8,66.4 119.8,66.4 120.2,66 120.2,62.6 119.4,61.8 116.3,61.8 116,62.1 116,63.6 116,65.6
NetJ1_2 on Top Layer "NETJ1_2_L01_P006" (solid, pour order 6): 117,66.621
NetC5_1 on Top Layer "NETC5_1_L01_P004" (solid, pour order 4): 112.9,70.8 114.2,70.8 114.8,71.4 119.8,71.4 120.2,71 120.2,69.6 119.6,69 115.4,69 114.2,70.2 112.9,70.2
24V on Top Layer "24V_L01_P002" (solid, pour order 2): 111.985,83 116,83 117,82 117,79.8 114.4,77.2 114.4,71.6 114,71.2 112.995,71.2 111.6,72.596 111.6,82.6
NetJ1_2 on Top Layer "NETJ1_2_L01_P000" (solid, pour order 0): 101,87 102,88 104.6,88 107.4,90.8 112.191,90.8 113.35,89.641 113.35,84.444 112.506,83.6 102,83.6 101,84.6
GND on Bottom Layer "GND_L02_P028" (solid, pour order 28): 88.275,115.594 89.875,115.594 123.675,81.794 123.675,49.194 128.675,44.194 161.275,44.194 191.475,13.994 191.475,12.394 183.675,4.594 181.075,4.594 169.675,15.994 124.475,15.994 112.475,3.994 109.475,3.994 79.275,34.194 79.275,36.994 91.675,49.394 91.675,93.994 80.475,105.194 80.475,107.794

## Keep-outs
Keep-Out Layer:
  lines w0.1: 96.166,66.348 96.166,73.834
  lines w0.2: 96.166,66.348 96.018,66.2 91.6,66.2 91.6,49.2 79.2,36.8 79.2,34 109.4,3.8 112.4,3.8 124.4,15.8 169.525,15.8 180.882,4.443 183.71,4.443 191.489,12.221 191.489,13.635 161.124,44 128.597,44 123.606,48.991 123.606,81.594 89.8,115.4 88.2,115.4 80.4,107.6 80.4,105 91.6,93.8 91.6,74 96,74 96.166,73.834

## Silkscreen, mask and mechanical layers (free items; w line width, h text height)
Top Overlay:
  text "00 = have IMU, 01 = no IMU" at 88.2,101.2 h1.2
  text "+" at 104.4,81.047 h3
  text "GND" at 115.383,57.8 h1
  text "RX" at 116,55.388 h1
  text "DIO" at 92.355,54.6 h1.2 r270
  text "TX" at 116,52.6 h1
  text "5V" at 116,50.2 h1
  text "CLK" at 92.3,49.8 h1.2 r270
  text "RST" at 89.82,27.2 h1.2 r270
  text "Henry Lau 2020" at 171.8,14.8 h1.8 r315
  text "M2 ROBOCON STUDIO" at 111.361,4.422 h1.8 r45

## Text inside footprints (layer, text, board x,y; h text height)
D1: Top Overlay "A" at 105.3,72 h1 r270; Top Overlay "K" at 105.3,68.6 h1 r270
D2: Top Overlay "A" at 98.1,41.5 h1; Top Overlay "K" at 100.2,41.5 h1
D3: Top Overlay "A" at 98.1,38.9 h1; Top Overlay "K" at 100.2,38.9 h1
D4: Top Overlay "A" at 98.1,36.4 h1; Top Overlay "K" at 100.2,36.4 h1